# EAGLE board RadioAdapterBoardV4 (EAGLE 7.7.0)
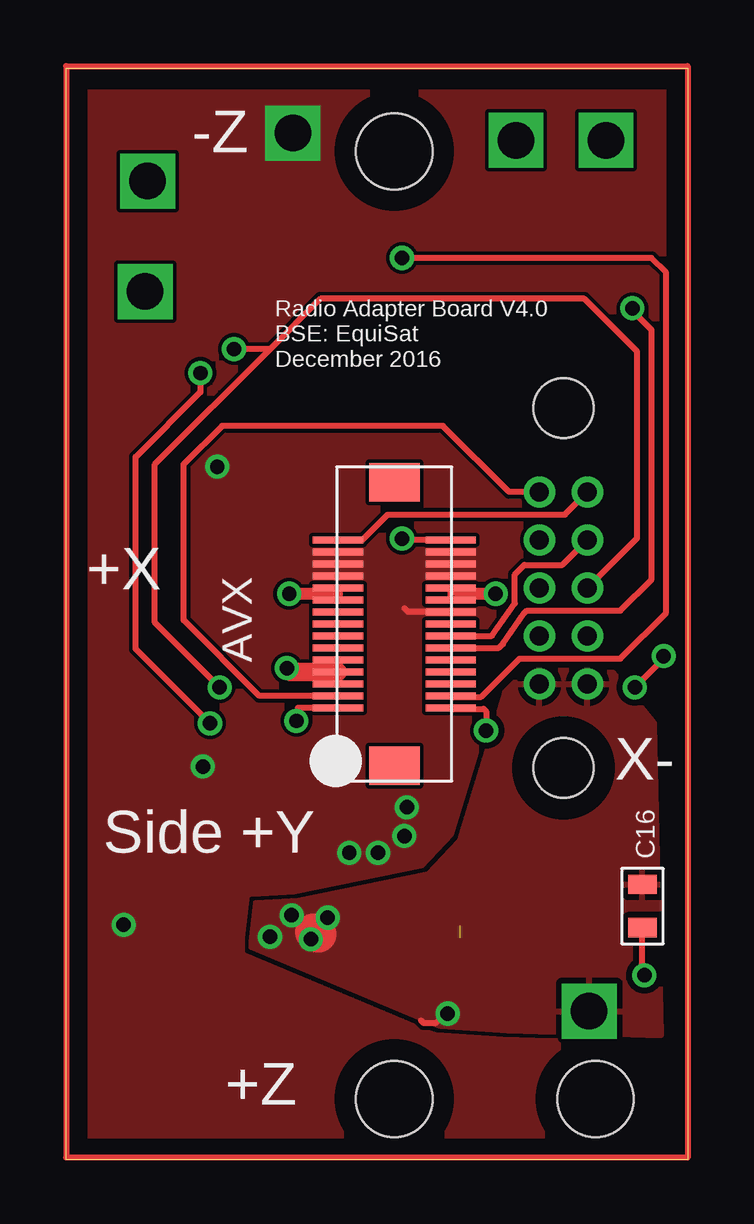
[diagram p0: board, top side]
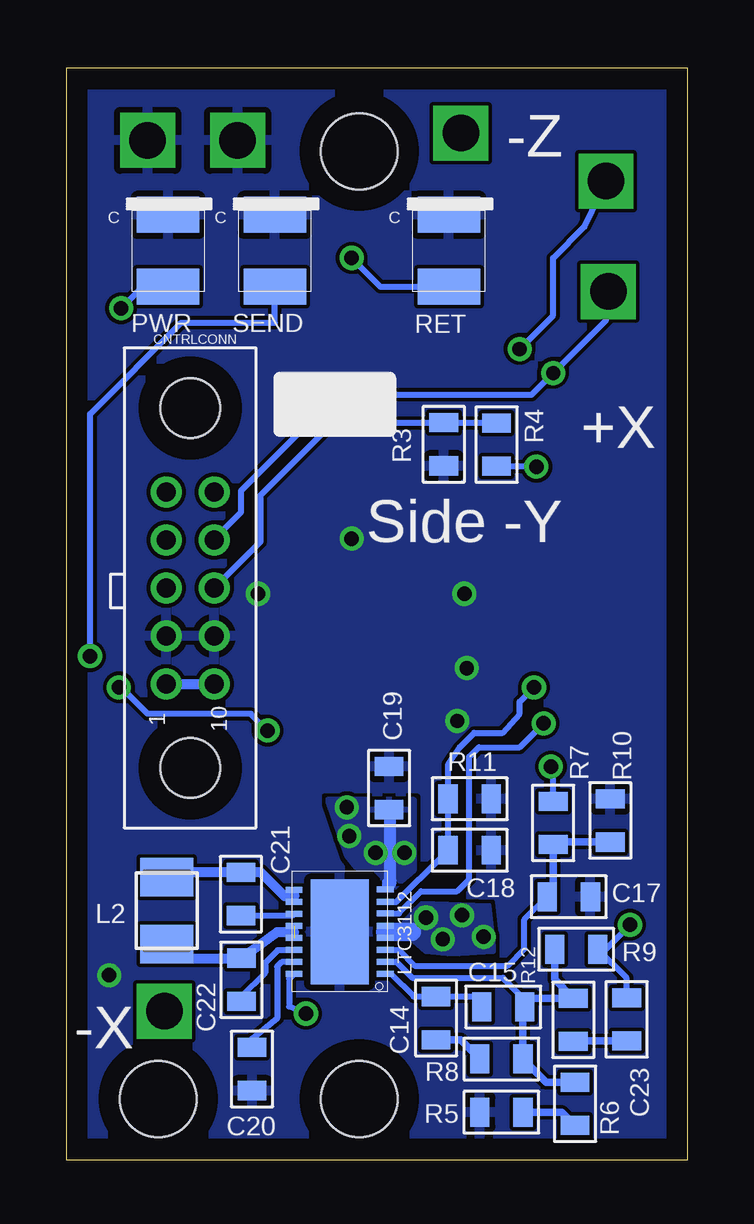
[diagram p1: board, bottom side, seen from below]

Size 25.9 x 45.5 mm. Coordinates in mm from the lower left corner, seen from the top.
Outline: 25.9,0 0,0 0,45.5 25.9,45.5 25.9,0
Copper layers (1*16): Top 0.035mm / dielectric 1.5mm / Bottom 0.035mm
Design rules "default *": minimum track width 10mil, minimum drill 24mil, track to track 6mil, track to pad 6mil, pad to pad 6mil, via to via 6mil, smd to smd 6mil, copper to edge 35mil, drill to drill 8mil, minimum pad ring 10mil, minimum via ring 8mil, stop-mask expansion 4mil, vias tented up to drill 0mil, thermal gap 10mil
Holes 3.18 mm at 22.06,2.54 13.68,2.54 13.68,42.04

## Footprints (pad centres in the part's own frame; a part is rotated, then mirrored left to right if it is on the bottom)
AVX-24-5046-630-829 = smd 0.3 x 2.1: P1 -3.45,2.35; P2 -3.45,-2.35; P3 -2.95,2.35; P4 -2.95,-2.35; P5 -2.45,2.35; P6 -2.45,-2.35; P7 -1.95,2.35; P8 -1.95,-2.35; P9 -1.45,2.35; P10 -1.45,-2.35; P11 -0.95,2.35; P12 -0.95,-2.35; P13 -0.45,2.35; P14 -0.45,-2.35; P15 0.05,2.35; P16 0.05,-2.35; P17 0.55,2.35; P18 0.55,-2.35; P19 1.05,2.35; P20 1.05,-2.35; P21 1.55,2.35; P22 1.55,-2.35; P23 2.05,2.35; P24 2.05,-2.35; P25 2.55,2.35; P26 2.55,-2.35; P27 3.05,2.35; P28 3.05,-2.35; P29 3.55,2.35; P30 3.55,-2.35 | smd 1.6 x 2.1: P31 -5.85,0; P32 5.95,0
0805 = smd 0.8 x 1.2: 1 -0.9,0; 2 0.9,0
HARWIN_DATAMATE_10_F = drill 0.8: P$1 0,-0.02; P$2 2,-0.02; P$3 4,-0.02; P$4 6,-0.02; P$5 8,-0.02; P$6 8,-2.02; P$7 6,-2.02; P$8 4,-2.02; P$9 2,-2.02; P$10 0,-2.02 | hole 2.5: -3.5,-1.02; 11.5,-1.02
L3225M = smd 1.6 x 2.2: 1 -1.4,0; 2 1.4,0
DHD16 = smd 0.25 x 0.7: 1 0.125,0.35; 2 0.625,0.35; 3 1.125,0.35; 4 1.625,0.35; 5 2.125,0.35; 6 2.638,0.35; 7 3.125,0.35; 8 3.638,0.35; 9 3.625,4.15; 10 3.125,4.15; 11 2.625,4.15; 12 2.125,4.15; 13 1.625,4.15; 14 1.125,4.15; 15 0.625,4.15; 16 0.125,4.15 | smd 4.34 x 2.44: 17 1.875,2.25
PLCC-2 = smd 2.6 x 1.5: A 0,0.75; C 0,-2.25
VIA-60MIL-SQ = drill 1.524 square: P$1 0,0

## Placement (x,y rotation side)
AVX  AVX-24-5046-030-630-829  [AVX-24-5046-630-829]  13.68,22.29 90 top
C14  680pF  [0805]  10.48,5.91 90 bottom
C15  22pF  [0805]  7.68,6.38 0 bottom
C16  10uF  [0805]  24.02,10.58 270 top
C17  100pF  [0805]  4.95,10.97 0 bottom
C18  100pF  [0805]  9.08,12.91 0 bottom
C19  47uF  [0805]  12.44,15.5 90 bottom
C20  1uF  [0805]  18.15,3.79 90 bottom
C21  0.1uF  [0805]  18.61,11.08 90 bottom
C22  0.1uF  [0805]  18.59,7.51 90 bottom
C23  47pF  [0805]  2.54,5.86 270 bottom
CNTRLCONN  HARWIN_10_F  [HARWIN_DATAMATE_10_F]  21.74,19.84 90 bottom
L2  4.7uH  [L3225M]  21.7,10.39 270 bottom
LTC3112  [DHD16]  12.25,7.63 90 bottom
PWR  LT-T673-Q1R2-25-Z  [PLCC-2]  21.65,37.15 180 bottom
R3  10K  [0805]  10.16,29.83 90 bottom
R4  10K  [0805]  7.96,29.82 270 bottom
R5  10K  [0805]  7.76,1.99 180 bottom
R6  150K  [0805]  4.69,2.34 270 bottom
R7  180K  [0805]  5.6,14.05 90 bottom
R8  33K  [0805]  7.76,4.21 0 bottom
R9  560K  [0805]  4.64,8.78 180 bottom
R10  47K  [0805]  3.22,14.15 270 bottom
R11  42.2K  [0805]  9.08,15.05 180 bottom
R12  10K  [0805]  4.76,5.84 270 bottom
RET  LT-T673-Q1R2-25-Z  [PLCC-2]  9.95,37.15 180 bottom
SEND  LT-T673-Q1R2-25-Z  [PLCC-2]  17.2,37.15 180 bottom
V1  VIN  [VIA-60MIL-SQ]  21.8,6.2 180 top
V2  3V6-SNS  [VIA-60MIL-SQ]  3.4,40.8 180 top
V3  GND  [VIA-60MIL-SQ]  22.5,42.5 270 top
V4  GND  [VIA-60MIL-SQ]  18.75,42.5 270 top
V5  3V6  [VIA-60MIL-SQ]  9.45,42.8 90 top
V6  3V6-EN  [VIA-60MIL-SQ]  3.3,36.2 0 top

## Library data of the parts
AVX CNTRLCONN LTC3112 = CNTRL_BOARD
C14-C23 R3-R12 V1-V6 = BrownSpaceEngineering
L2 = resistor
PWR RET SEND = CNTRL_BOARD; OC_NEWARK: unknown

## Nets
3V6: AVX.P18 AVX.P23 AVX.P24 AVX.P25 AVX.P26 AVX.P27 AVX.P28 C19.1 C23.1 LTC3112.8 R4.2 R7.2 R9.1 V5.P$1
3V6-EN: CNTRLCONN.P$7 LTC3112.6 V6.P$1
3V6-REF: CNTRLCONN.P$8 R3.2 R4.1
3V6-SNS: C18.1 CNTRLCONN.P$3 LTC3112.7 R11.2 V2.P$1
COMP: C14.2 C15.1 LTC3112.1
FB: C15.2 LTC3112.2 R6.1 R8.2 R9.2 R12.1
GND: AVX.P1 AVX.P5 AVX.P7 AVX.P9 AVX.P19 AVX.P20 AVX.P21 AVX.P22 AVX.P30 C16.2 C17.2 C18.2 C19.2 C20.1 CNTRLCONN.P$2 CNTRLCONN.P$9 LTC3112.17 PWR.C R3.1 R5.2 R10.1 R11.1 RET.C SEND.C V3.P$1 V4.P$1
N$2: C22.2 L2.2 LTC3112.12 LTC3112.13
N$4: C14.1 R8.1
N$5: C23.2 R12.2
N$6: R5.1 R6.2
N$23: C20.2 LTC3112.15
N$25: C22.1 LTC3112.14
N$28: C21.2 L2.1 LTC3112.9 LTC3112.10
N$29: C21.1 LTC3112.11
OVP: C17.1 LTC3112.3 R7.1 R10.2
P2: AVX.P2 SEND.A
P3: AVX.P3 CNTRLCONN.P$6
P4: AVX.P4 RET.A
P12: AVX.P12 PWR.A
P14: AVX.P14 CNTRLCONN.P$4
P29: AVX.P29 CNTRLCONN.P$5
VIN: C16.1 CNTRLCONN.P$1 CNTRLCONN.P$10 LTC3112.4 LTC3112.5 LTC3112.16 V1.P$1

## Tracks (layer width: path | path; a pad name or v marks a point on that pad's centre or on a via)
3V6  (via drill 0.6)
  Top 0.254: 14.1,23 14.26,22.84 AVX.P18
  Bottom 0.254: 2.54,9.66 v2.4,9.8 3.42,8.78 R9.1 2.54,7.58 C23.1 | R7.2 5.6,16.3 v5.7,16.4 | v6.3,28.9 7.94,28.9 R4.2 | LTC3112.8 12.6,11.5 | 12.6,11.6 12.6,11.5 | 12.6,11.5 12.5,11.4 12.5,11.6 12.4,11.7
  Bottom 0.508: 12.4,11.5 12.4,11.7 12.4,14.56 C19.1
  other vias: 11.8,12.8 13,12.8 14.1,13.5 14.2,14.7
  pour Top (isolate 0.127, rank 2, no thermals): 0.1,48.75 28.1,48.5 28.6,-1.75 0.6,-1.5
  pour Bottom: 12.2,11.4 11.4,12.1 11.4,15 15,15 14.2,12.7 13.8,12.2 13.1,12.2 12.7,11.8 12.7,11.4
3V6-EN  (via drill 0.6)
  Top 0.254: v6,18.2 2.9,21.3 2.9,29.3 5.6,32 v5.6,32.8
  Bottom 0.254: LTC3112.6 12.03,10.27 11.1,11.2 9.6,11.2 9.1,11.7 9.1,16.8 8.7,17.2 7,17.2 v6,18.2 | CNTRLCONN.P$7 19.73,25.88 18.6,27 18.6,27.9 14.6,31.9 6.5,31.9 v5.6,32.8 3.4,35 V6.P$1
3V6-REF
  Bottom 0.254: R3.2 R4.1 14.78,30.72 17.8,27.7 17.8,25.77 CNTRLCONN.P$8
3V6-SNS  (via drill 0.6)
  Top 0.254: v6.4,19.7 3.7,22.4 3.7,29 8.5,33.8 | CNTRLCONN.P$3 23.8,25.92 23.8,33.7 21.6,35.9 10.6,35.9 8.5,33.8 | 8.5,33.8 v7,33.8
  Bottom 0.254: LTC3112.7 12.15,10.76 11.2,11.7 11.19,11.7 C18.1 R11.2 9.98,16.48 9.5,17.2 8.9,17.8 7.7,17.8 7,18.6 7,19.1 v6.4,19.7 | v7,33.8 5.6,35.2 5.6,37.6 4.3,38.9 V2.P$1
COMP
  Bottom 0.254: LTC3112.1 12.36,7.75 11.42,6.81 C14.2 8.58,6.81 C15.1
FB
  Bottom 0.254: LTC3112.2 12.14,8.26 11.48,7.6 7.7,7.6 6.78,6.68 C15.2
  Bottom 0.305: C15.2 6.86,6.3 R8.2 5.89,3.24 R6.1 | 6.78,6.68 6.72,6.74 R12.1 5.54,7.52 R9.2
GND  (via drill 0.6)
  Top 0.254: AVX.P30 14.06,25.84 v14,25.9 | 16.54,23.59 16.28,23.59 AVX.P22 AVX.P20 | AVX.P1 9.66,18.84 v9.6,18.3 | AVX.P9 AVX.P7 AVX.P5 | AVX.P21 AVX.P19 11.3,23.37 11.3,23.6 | v24.1,7.7 24.02,7.78 C16.2
  Top 0.508: v17.9,23.6 16.55,23.6 16.54,23.59 | 11.3,23.6 v9.3,23.6
  Top 0.762: AVX.P7 9.36,20.34 v9.2,20.5
  pour Bottom (rank 2): -0.15,49 28.35,48.75 28.85,-1.75 0.1,-1.75
N$1
  Top 0.25: 25.9,0.1 0,0.1 0,45.6 25.9,45.6 25.9,0.1
N$2  (2 unrouted)
  Bottom 0.406: L2.2 21.08,8.41 C22.2 17.11,9.49 16.41,9.49 16.4,9.5
N$4
  Bottom 0.305: R8.1 9.46,5.01 C14.1
N$5
  Bottom 0.305: R12.2 4.74,4.96 C23.2
N$6
  Bottom 0.305: R6.2 5.24,1.99 R5.1
N$23
  Bottom 0.254: LTC3112.15 16.91,8.25 17.1,8.06 17.1,5.9 18.15,5.05 C20.2
N$25
  Bottom 0.254: LTC3112.14 16.41,8.74 17.08,8.74 17.6,8.22 17.6,7.8 18.59,6.81 C22.1
N$28
  Bottom 0.254: LTC3112.10 LTC3112.9 16.4,11.03 16.38,11.01
  Bottom 0.406: 16.38,11.01 16.39,11 16.8,11 17.78,11.98 C21.2 21.51,11.98 L2.1
N$29
  Bottom 0.254: LTC3112.11 16.48,10.18 C21.1
OVP
  Bottom 0.254: LTC3112.3 12.02,8.75 11.37,8.1 7.5,8.1 6.8,8.8 6.8,10.02 C17.1
  Bottom 0.305: C17.1 5.6,11.22 R7.1 5.5,13.25 R10.2
P2  (via drill 0.6)
  Top 0.254: AVX.P2 16.07,18.8 17.4,18.8 17.5,18.7 v17.5,17.9 | v23.7,19.7 24.9,20.9 v24.9,21
  Bottom 0.254: v17.5,17.9 18.2,18.6 22.5,18.6 23.6,19.7 v23.7,19.7 | v24.9,21 24.9,31.1 21.1,34.9 17.2,34.9 SEND.A
P3
  Top 0.254: AVX.P3 8.06,19.34 4.9,22.5 4.9,29 6.5,30.6 15.7,30.6 18.46,27.84 CNTRLCONN.P$6
P4  (via drill 0.6)
  Top 0.254: AVX.P4 16.07,19.3 17.3,19.3 18.9,20.9 23.1,20.9 25,22.8 25,37 24.4,37.6 v14,37.6
  Bottom 0.254: v14,37.6 12.8,36.4 RET.A
P12  (via drill 0.6)
  Top 0.254: AVX.P12 18.04,21.34 18.2,21.5 19.1,22.8 19.2,22.9 23.1,22.9 24.4,24.2 24.4,34.6 23.6,35.4 v23.6,35.5
  Bottom 0.254: v23.6,35.5 22.7,36.4 PWR.A
P14
  Top 0.254: AVX.P14 17.74,21.84 18.7,23.2 18.7,24.4 19.1,24.8 20.68,24.8 CNTRLCONN.P$4
P29
  Top 0.254: 22,27.9 21.78,27.9 CNTRLCONN.P$5 20.78,26.9 13.4,26.9 12.34,25.84 AVX.P29
VIN  (via drill 0.6)
  Top 0.254: v15.9,6.1 15.6,5.9 15.4,5.7 14.9,5.7 14.8,5.8
  Top 1.524: 10.3,9.5 10.4,9.5 10.5,9.4
  Bottom 0.254: LTC3112.16 16.6,7.55 16.6,6.4 v15.9,6.1 | LTC3112.5 12.6,9.5 LTC3112.4
  Bottom 0.406: CNTRLCONN.P$1 CNTRLCONN.P$10
  Bottom 0.762: 12.6,9.5 11.5,9.5
  other vias: 9.4,10.2 10.9,10.1 10.2,9.2 8.5,9.3
  pour Top (isolate 0.254): 24.5,18.2 22.8,20.3 19.4,20.6 18.3,19.5 16.4,13.3 15.1,11.9 9.7,10.8 7.9,10.7 7.7,8.9 15.6,5.6 18.4,5.4 24.8,5.2
  pour Bottom: 11.7,9.4 11.8,9.9 11.1,10.7 8.3,10.6 8.1,8.7 9.8,8.6 10.9,8.7

## Text on the board
tPlace: Radio Adapter Board V4.0 / BSE: EquiSat / December 2016
tNames: -Z | +X | -X | Side +Y | +Z
bNames: -Z | +X | Side -Y | -X